# EAGLE board rj11-breakout (EAGLE 6.5.0)
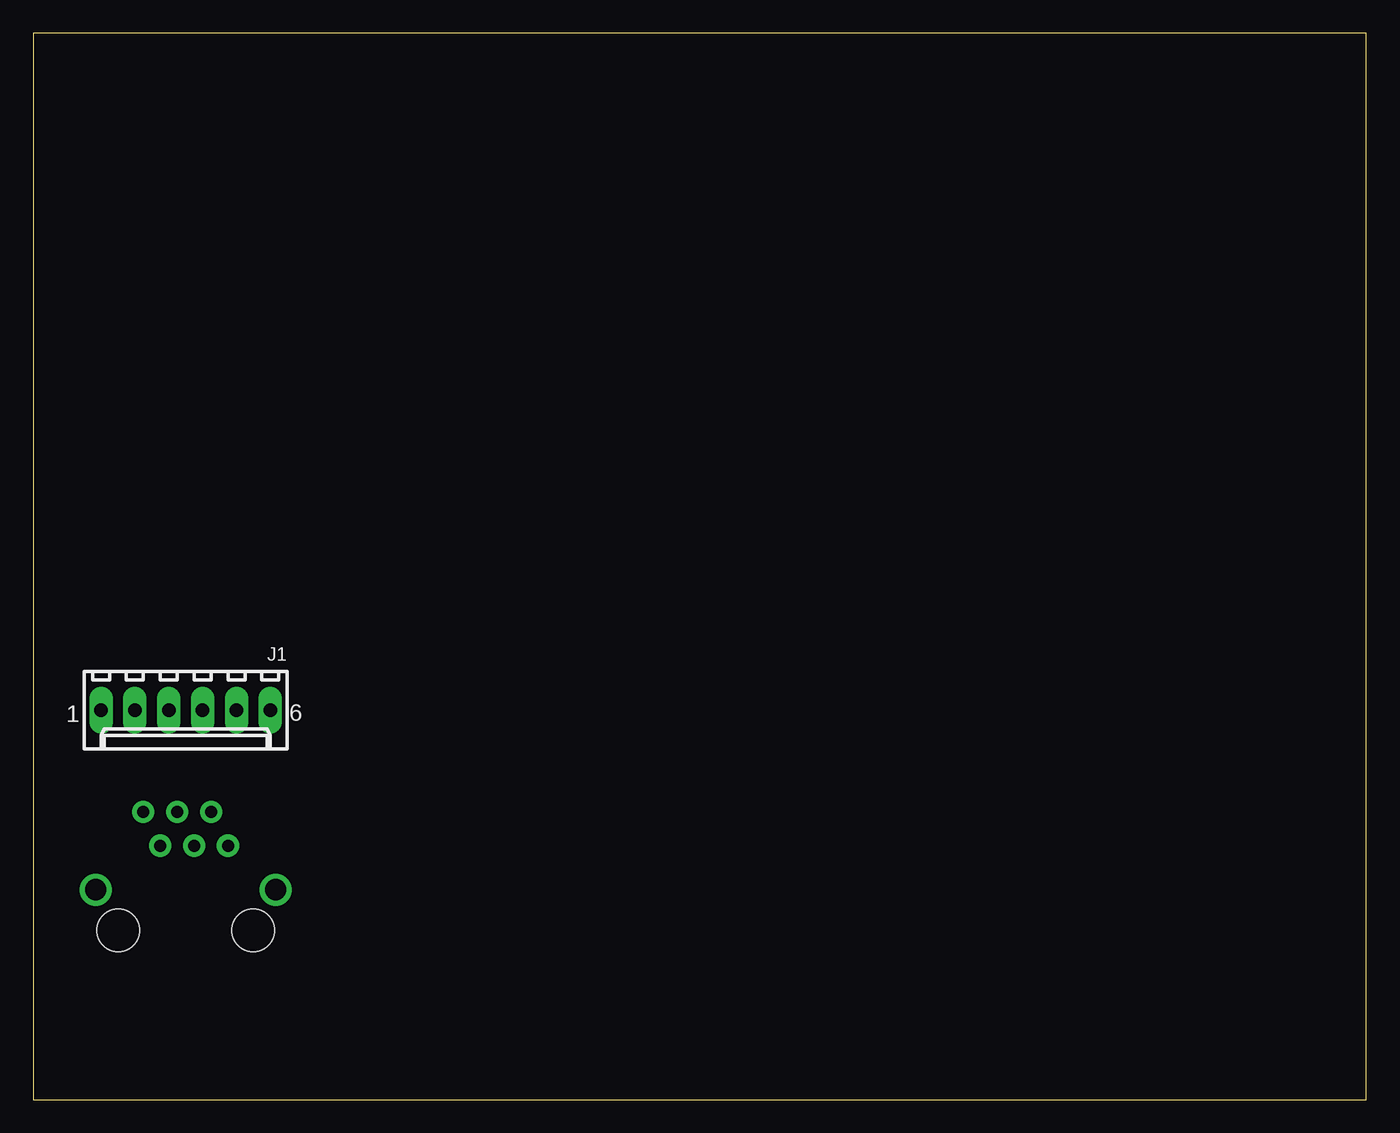
[diagram p0: board, top side]
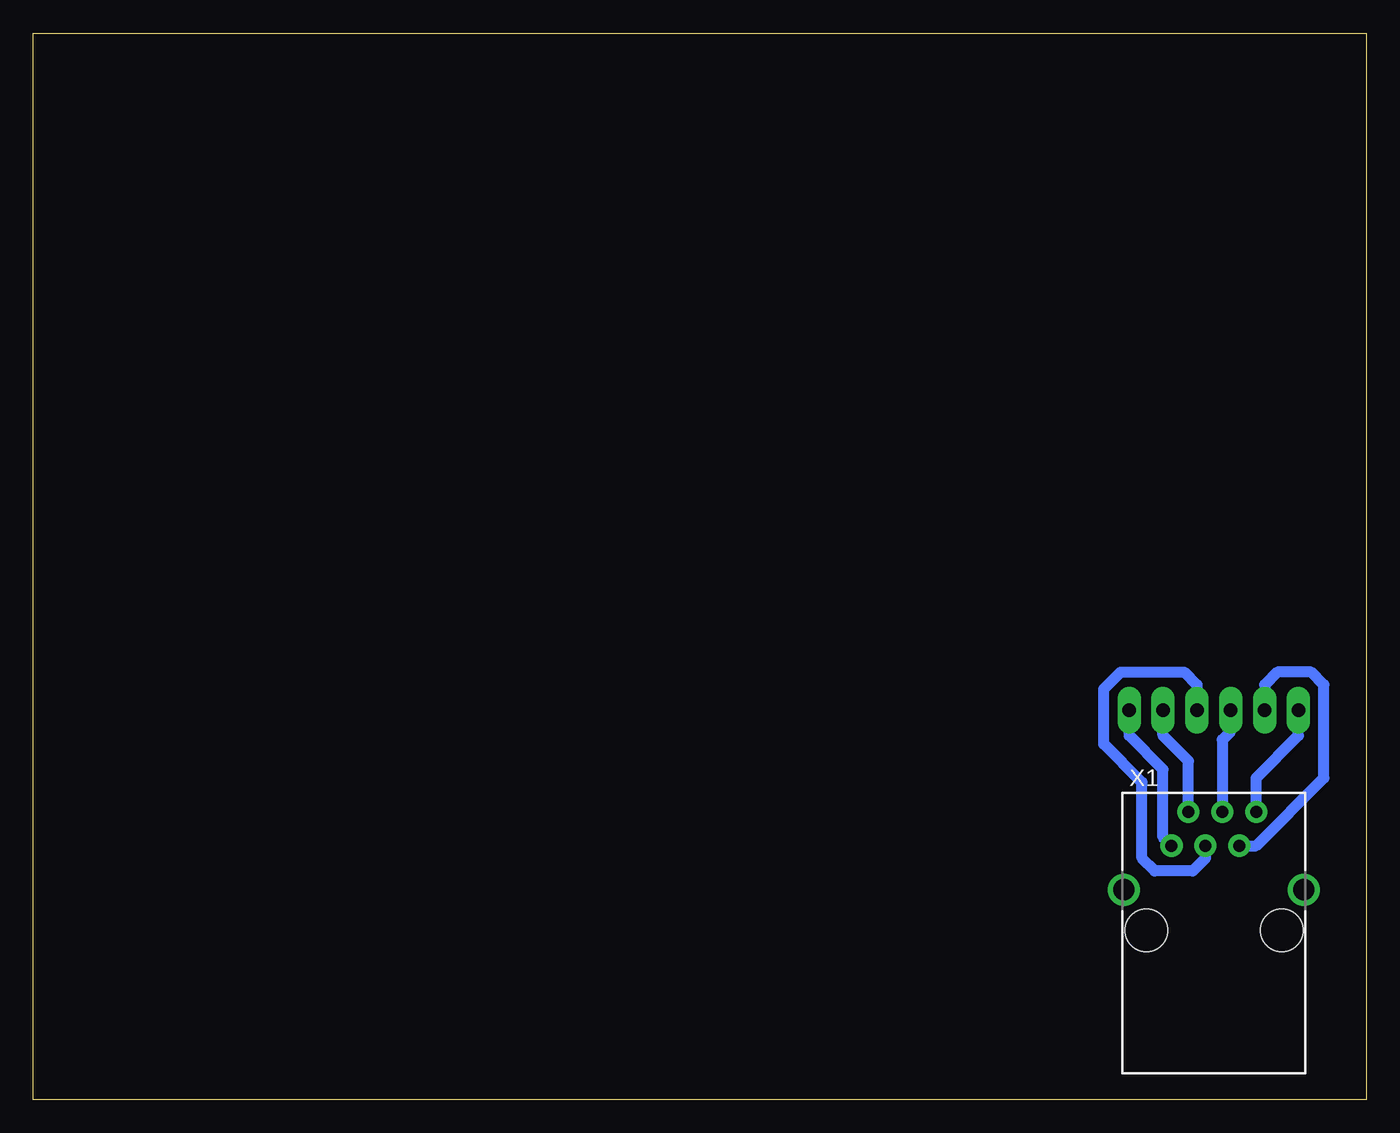
[diagram p1: board, bottom side, seen from below]

Size 100 x 80 mm. Coordinates in mm from the lower left corner, seen from the top.
Outline: 0,0 100,0 100,80 0,80 0,0
Copper layers (1*16): Top 0.035mm / dielectric 1.5mm / Bottom 0.035mm
Design rules "homepcb": minimum track width 10mil, minimum drill 20mil, track to track 10mil, track to pad 10mil, pad to pad 10mil, via to via 10mil, smd to smd 10mil, copper to edge 40mil, drill to drill 10mil, minimum pad ring 15mil, minimum via ring 10mil, stop-mask expansion 0mil, vias tented up to drill 0mil, thermal gap 10mil

## Footprints (pad centres in the part's own frame; a part is rotated, then mirrored left to right if it is on the bottom)
6410-06 = drill 1.016 long: 1 6.35,0; 2 3.81,0; 3 1.27,0; 4 -1.27,0; 5 -3.81,0; 6 -6.35,0
XRJK-S-01-6-6-0-2G2-NO = drill 0.9 pad 1.5: 1 -3.175,6.35; 2 -1.905,8.89; 3 -0.635,6.35; 4 0.635,8.89; 5 1.905,6.35; 6 3.175,8.89 | drill 1.6 pad 2.184: S1 -6.75,3.05; S2 6.75,3.05 | hole 3.2: -5.08,0; 5.08,0

## Placement (x,y rotation side)
J1  22-27-2061-06  [6410-06]  11.43,29.21 180 top
X1  XRJK-S-01-6-6-0-2G2-NO  [XRJK-S-01-6-6-0-2G2-NO]  11.43,12.7 0 bottom

## Library data of the parts
J1 = con-molex; OC_FARNELL: unknown; OC_NEWARK: unknown
X1 = con-xmultiple

## Nets
N$1: J1.6 X1.1
N$2: J1.5 X1.2
N$3: J1.4 X1.3
N$4: J1.3 X1.4
N$5: J1.2 X1.5
N$6: J1.1 X1.6

## Tracks (layer width: path | path; a pad name or v marks a point on that pad's centre or on a via)
N$1
  Bottom 0.813: X1.1 15.24,19.68 15.24,24.77 17.78,27.3 J1.6
N$2
  Bottom 0.813: X1.2 13.34,25.4 15.24,27.3 J1.5
N$3
  Bottom 0.813: X1.3 12.06,18.1 13.02,17.14 15.88,17.14 16.83,18.1 16.83,23.81 19.68,26.67 19.68,30.8 18.41,32.07 13.65,32.07 12.7,31.11 J1.4
N$4
  Bottom 0.813: J1.3 10.16,27.62 10.79,26.99 X1.4
N$5
  Bottom 0.813: X1.5 8.26,19.05 3.17,24.13 3.17,31.11 4.13,32.07 6.67,32.07 7.62,31.11 J1.2
N$6
  Bottom 0.813: X1.6 8.26,24.13 5.08,27.3 J1.1